# Altium PCB 海关全向控制器主控板V4.PcbDoc (part 2 of 3)
Units mil, origin at the board's own origin, x right, y up, seen from the top; angles counter-clockwise.
Board outline 3779.53 x 2795.28 mil, 2 copper layers (Top Layer, Bottom Layer), stack 65.792 mil thick; 119 components, 89 nets, 395 pads, 56 vias.
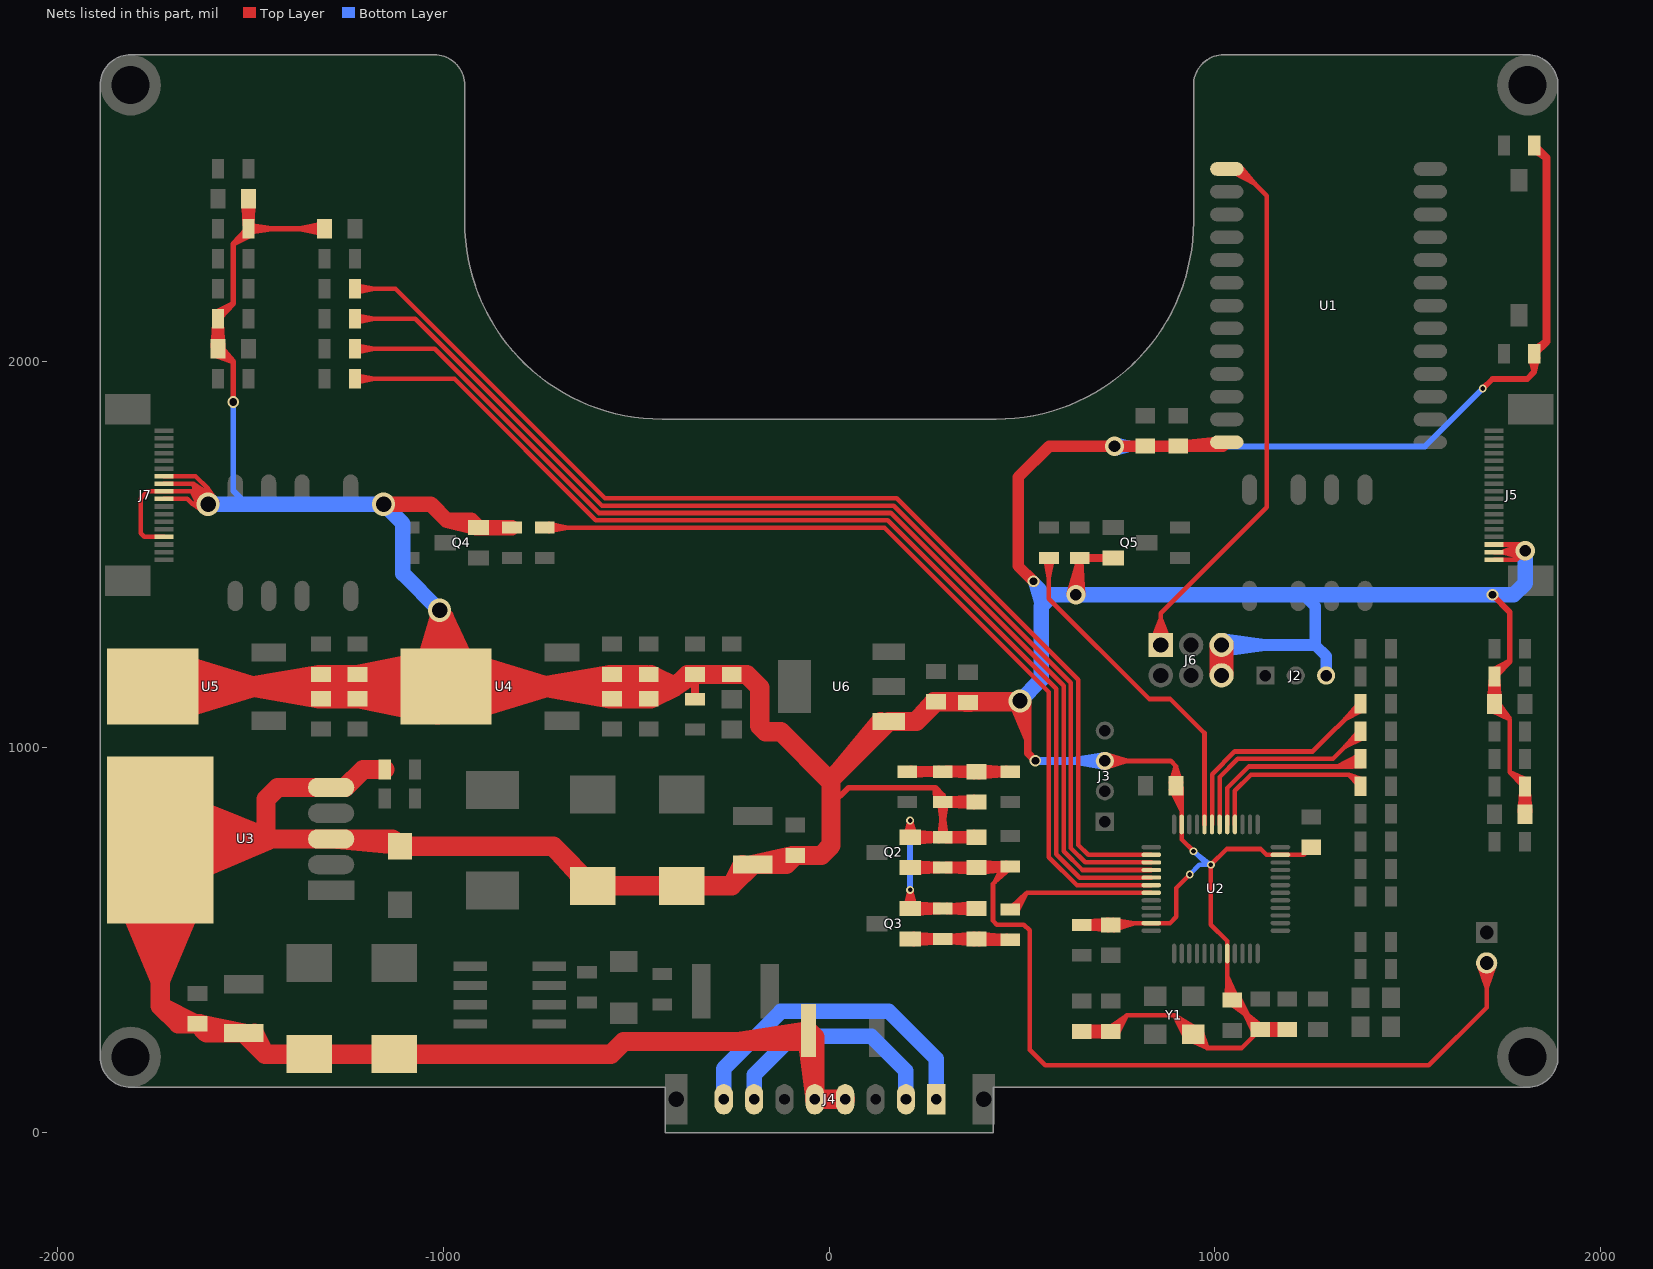
[diagram p2: the nets of this part, all layers, seen from the top]

## Via types
v1: diameter 20, hole 12, Top Layer to Bottom Layer, tented both sides, 31 vias
v2: diameter 30, hole 20, Top Layer to Bottom Layer, tented both sides, 12 vias
v3: diameter 50, hole 30, Top Layer to Bottom Layer, tented both sides, 8 vias
v4: diameter 60, hole 40, Top Layer to Bottom Layer, tented both sides, 5 vias

## Nets (pads, with @x,y where several pads share a name; then routed paths per layer and width w, separated by ;. In a path a pad name is that pad's centre, name@x,y a point inside that pad or via, vN(x,y) a via of type N, cw(c..) or ccw(c..) an arc to the next point about the centre after c; other vN are vias at no path point) (continued)
BT_TX: J6.1 U1.1 | length 1892.4
  Top Layer w12: J6.1@834.96,1269.82 860,1332.5 ; J6.1@846.57,1266.35 860,1332.5 ; J6.1@860,1265 860,1346.87 1135,1621.87 1135,2430 1065.67,2499.33 U1.1@1006.22,2499.33 ; J6.1@873.43,1266.35 860,1332.5 ; J6.1@885.04,1269.82 860,1332.5 ; U1.1@1050.3,2489.59 1104.85,2460.15 ; U1.1@1056.81,2499.33 1104.85,2460.15 ; U1.1@1065.04,2507.67 1104.85,2460.15
CH+: J4.2 J4.7 | length 714.5
  Bottom Layer w40: J4.7@-194.45,87.12 -194.45,150.55 ; J4.7@-194.45,102.87 -194.45,150.55 ; J4.2@199.25,87.12 199.25,160.75 ; J4.2@199.25,102.87 199.25,160.75 ; -194.45,150.55 -95,250 110,250 199.25,160.75
CH-: J4.1 J4.8 | length 1001.1
  Bottom Layer w40: J4.8@-273.19,87.12 -273.19,166.81 ; J4.8@-273.19,102.87 -273.19,166.81 ; J4.1@277.99,87.12 277.99,192.01 ; J4.1@277.99,102.87 277.99,192.01 ; -273.19,166.81 -125,315 155,315 277.99,192.01
CTRBTPOW: R18.2 U2.32 | length 1087
  Top Layer w12: R18.2@560.3,1489.71 570,1438.88 ; R18.2@579.7,1489.71 570,1438.88 ; U2.32@973.35,799.72 973.35,1036.65 885,1125 830,1125 570,1385 R18.2@570,1490.63 570,1438.88 ; U2.32@973.35,819.8 973.35,861.31
CTRPOW: R12.1 U2.43 | length 580.3
  Top Layer w12: R12.1@470,579.37 513.19,622.56 U2.43@835.55,622.56 ; R12.1@472.68,585.98 511.2,620.57 ; R12.1@479.84,579.37 511.2,620.57 ; R12.1@488.12,574.22 511.2,620.57 ; 773.96,622.56 U2.43@815.47,622.56
CTRVEDIOPOW: R17.2 U2.42 | length 2404.3
  Top Layer w12: R17.2@-737.12,1569.37 143.76,1569.37 570,1143.13 570,715 642.76,642.24 U2.42@835.55,642.24 ; R17.2@-727.28,1569.37 -675.53,1569.37 ; R17.2@-726.36,1559.67 -675.53,1569.37 ; R17.2@-726.36,1579.07 -675.53,1569.37 ; 773.96,642.24 U2.42@815.47,642.24
GND: C1.2 C2.1 C3.2 C4.2 C5.2 C6.2 C7.2 C8.2 C9.2 C10.2 C11.2 C12.1 C13.2 C14.2 C15.2 C16.1 C17.2 C18.2 C19.2 C20.2 C21.2 C22.2 C23.2 C24.2 C25.2 C26.2 C27.2 C28.2 C29.2 C30.2 C31.2 C32.2 C33.2 C34.2 C35.2 C36.2 C37.2 C38.1 D3.2 D4.1 J2.3 J3.3 J4.4 J4.5 J5.1 J5.2 J5.3 J6.5 J6.6 J7.7 J7.8 J7.9 J7.10 J7.15 Q2.2 Q3.2 Q4.2 Q5.2 R1.2 R2.1 R5.2 R6.1 R11.2 R13.2 R19.2 R20.2 R22.1 R23.2 R24.1 R25.1 R40.1 R41.1 U1.13 U2.8 U2.23 U2.35 U2.47 U3.0 U3.3 U3.5 U4.2 U5.2 U6.1 Y1.2 | length 63935.1
  Top Layer w12: J7.15@-1743.11,1545.28 -1775.28,1545.28 ; J7.9@-1743.11,1663.39 -1766.61,1663.39 ; J7.15@-1724.41,1545.28 -1775.28,1545.28 ; J7.10@-1724.41,1643.7 -1663.7,1643.7 -1650,1630 ; J7.8@-1724.41,1683.07 -1648.07,1683.07 ; J7.7@-1724.41,1702.76 -1642.76,1702.76 -1610,1670 ; J7.10@-1705.71,1643.7 -1663.8,1643.7 ; J7.9@-1705.71,1663.39 -1663.8,1663.39 ; J7.8@-1705.71,1683.07 -1663.8,1683.07 ; J7.7@-1705.71,1702.76 -1663.8,1702.76 ; v4@-1632.89,1637.2 -1610,1670 ; v4@-1631.74,1619.83 -1648.07,1683.07 ; v4@-1628.45,1614.65 -1653.39,1663.39 ; v4@-1621.86,1631.8 -1610,1670 ; v4@-1620.35,1623.93 -1648.07,1683.07 ; v4@-1618.32,1621.35 -1653.39,1663.39 ; v4@-1617.2,1607.11 -1650,1630 ; v4@-1617.2,1652.89 -1650,1630 ; v4@-1611.8,1618.14 -1650,1630 ; v4@-1611.8,1641.86 -1650,1630 ; v4@-1610,1645 -1648.07,1683.07 ; v4@-1603.77,1640.26 -1653.39,1663.39 ; v4@-1600.93,1637.86 -1648.07,1683.07 ; v4@-1599.89,1651.77 -1653.39,1663.39 ; v4@-1598.14,1631.8 -1610,1670 ; v4@-1593.4,1647.33 -1648.07,1683.07 ; v4@-1587.11,1637.2 -1610,1670 ; C9.2@655,263.03 C10.2@730,263.03 771.97,305 ; R5.2@655,539.37 C7.2@730,539.37 734.45,543.82 U2.47@835.55,543.82 883.82,543.82 ; C9.2@659.64,249.4 C10.2@716.15,251.02 ; C9.2@659.64,276.66 C10.2@716.15,275.04 ; R5.2@664.84,539.37 C7.2@716.59,539.37 ; C9.2@665.41,250.11 C10.2@716.15,275.04 ; C9.2@665.41,275.95 C10.2@716.15,251.02 ; R5.2@665.76,529.67 C7.2@716.59,539.37 ; R5.2@665.76,549.07 C7.2@716.59,539.37 ; J3.3@715,964.37 885.63,964.37 899.37,950.63 ; J3.3@717.6,946.94 774.62,964.37 J3.3@717.6,981.8 ; C7.2@720.24,526.24 R5.2@668.68,548.52 ; C7.2@720.24,552.5 R5.2@668.68,530.22 ; C10.2@722.41,249.45 C9.2@668.41,263.03 ; C10.2@722.41,276.61 C9.2@668.41,263.03 ; C10.2@724.09,263.03 C9.2@668.41,263.03 ; C7.2@724.66,525.7 R5.2@668.68,530.22 ; C7.2@724.66,553.04 R5.2@668.68,548.52 ; C10.2@726.71,273.16 771.97,305 ; C10.2@735.91,263.03 771.97,305 ; C7.2@735.91,539.37 791.86,543.82 ; C7.2@736.49,553.04 791.86,543.82 ; C7.2@738.64,525.96 791.86,543.82 ; C10.2@747.31,255.46 771.97,305 ; 773.96,543.82 U2.47@815.47,543.82 ; U2.47@855.63,543.82 883.82,543.82 ; C5.2@885.85,908 899.37,950.63 ; C5.2@886.58,889.23 914.29,835.61 ; C5.2@899.37,894.09 914.29,835.61 ; C5.2@899.37,900 899.37,950.63 ; C5.2@899.37,905.91 899.37,950.63 ; C5.2@909.37,900 914.29,895.08 U2.35@914.29,799.72 914.29,760.71 ; C5.2@912.89,908 899.37,950.63 ; C5.2@912.93,895.95 914.29,835.61 ; U2.35@914.29,779.64 914.29,760.71 ; U2.35@914.29,819.8 914.29,861.31 ; Y1.2@924.07,244.78 895,305 ; Y1.2@934.41,250.97 895,305 ; v1(935,670) 900,635 900,560 883.82,543.82 ; Y1.2@936.49,240.05 980,220 ; Y1.2@940.28,255.79 895,305 ; Y1.2@942.9,250.31 980,220 ; Y1.2@945.56,261.24 895,305 ; Y1.2@948.15,255.79 980,220 ; Y1.2@952.59,271.02 895,305 ; Y1.2@954.2,260.37 980,220 ; Y1.2@965.14,265.54 980,220 ; 990,649 v1(990,695) ; C8.2@1031.37,343.1 1032.4,405.67 ; 1032.4,403.49 U2.8@1032.4,445 ; U2.8@1032.4,485.15 1032.4,497.6 ; C8.2@1041.67,334.27 1090.14,299.23 ; C8.2@1050.91,344.37 1090.14,299.23 ; C8.2@1058.02,348.57 1032.4,405.67 ; C8.2@1062.19,352.11 1090.14,299.23 ; C4.2@1100.36,260.78 1074.87,314.5 ; C4.2@1111.97,268.03 1074.87,314.5 ; C4.2@1121.61,277.74 1074.87,314.5 ; C4.2@1123.78,268.03 C3.2@1179.47,268.03 ; C4.2@1125.46,254.45 C3.2@1179.47,268.03 ; C4.2@1125.46,281.61 C3.2@1179.47,268.03 ; U2.23@1150.12,720.98 1134.02,720.98 ; C3.2@1177.19,255.21 C4.2@1127.04,281.21 ; C3.2@1177.19,280.85 C4.2@1127.04,254.84 ; C3.2@1183.53,254.43 C4.2@1127.04,254.84 ; C3.2@1183.53,281.62 C4.2@1127.04,281.21 ; C3.2@1187.88,268.03 C4.2@1117.88,268.03 ; U2.23@1190.28,720.98 C6.2@1230.35,720.98 ; C6.2@1250,740.63 C6.2@1230.35,720.98 ; C34.2@1711.96,1117.33 R24.1@1715.93,1172.81 ; C34.2@1712.05,1119.73 R24.1@1725.63,1173.73 ; C34.2@1712.07,1119.87 R24.1@1725.63,1169.37 ; C34.2@1712.55,1122.07 R24.1@1735.33,1172.81 ; C34.2@1718.23,1094.72 1765,1072.77 ; R24.1@1718.53,1176.47 R24.1@1725.63,1169.37 ; J5.1@1724.41,1486.22 1781.81,1486.22 ; J5.2@1724.41,1505.91 v3@1801.5,1505.91 ; J5.3@1724.41,1525.59 1788.82,1525.59 v3(1805,1509.41) ; C34.2@1725.63,1106.23 1765,1072.77 ; C34.2@1735.8,1115.39 1765,1072.77 ; C34.2@1738.71,1122.07 R24.1@1715.93,1172.81 ; C34.2@1739.21,1119.73 R24.1@1725.63,1173.73 ; C34.2@1739.19,1119.87 R24.1@1725.63,1169.37 ; C34.2@1739.3,1117.33 R24.1@1735.33,1172.81 ; J5.1@1743.11,1486.22 1781.81,1486.22 ; J5.2@1743.11,1505.91 v3@1785.02,1505.91 ; J5.3@1743.11,1525.59 1785.02,1525.59 ; C35.2@1790.7,831.61 R25.1@1794.67,887.09 ; C35.2@1791.29,836.35 R25.1@1814.07,887.09 ; R25.1@1795,905 1765,935 ; R25.1@1798.03,900.29 1765,935 ; C35.2@1804.37,826.42 R25.1@1804.37,897.85 ; R25.1@1804.37,907.69 1765,935 ; R25.1@1809.08,916.22 1765,935 ; C35.2@1817.45,836.35 R25.1@1794.67,887.09 ; C35.2@1818.04,831.61 R25.1@1814.07,887.09 ; -1775.28,1545.28 -1785,1555 -1785,1645 -1766.61,1663.39 ; -1766.61,1663.39 J7.9@-1724.41,1663.39 -1653.39,1663.39 ; -1653.39,1663.39 v4(-1610,1630) ; -1653.39,1663.39 v4@-1620,1630 ; -1650,1630 v4(-1610,1630) ; -1650,1630 v4@-1620,1630 ; -1648.07,1683.07 v4(-1610,1630) ; v4@-1620,1630 v4(-1610,1630) ; v4(-1610,1630) -1610,1670 ; C9.2@660.91,263.03 C10.2@716.59,263.03 ; C9.2@660.91,263.03 C10.2@716.15,275.04 ; C9.2@660.91,263.03 C10.2@716.59,263.03 ; C9.2@660.91,263.03 C10.2@716.15,251.02 ; R5.2@668.41,539.37 C7.2@724.09,539.37 ; R5.2@668.41,539.37 722.41,552.95 R5.2@668.41,539.37 ; R5.2@668.41,539.37 722.41,525.79 R5.2@668.41,539.37 ; R5.2@668.41,539.37 C7.2@724.09,539.37 ; R5.2@668.68,530.22 C7.2@724.09,539.37 ; R5.2@668.68,548.52 C7.2@724.09,539.37 ; C10.2@716.59,263.03 662.59,249.45 C10.2@716.59,263.03 ; C10.2@716.59,263.03 662.59,276.61 C10.2@716.59,263.03 ; 771.97,305 895,305 ; 895,305 Y1.2@944.21,255.79 980,220 ; 914.29,760.71 v1(945,730) 914.29,760.71 ; 980,220 1069.85,220 C4.2@1117.88,268.03 ; v1(990,695) 1031,736 1119,736 1134.02,720.98 ; v1(990,695) 990,540 1032.4,497.6 ; 1032.4,405.67 C8.2@1045,344.37 ; 1032.4,497.6 U2.8@1032.4,465.08 1032.4,356.97 C8.2@1045,344.37 ; C8.2@1045,344.37 1117.88,271.5 C4.2@1117.88,268.03 ; C4.2@1126.28,268.03 C3.2@1181.97,268.03 ; C4.2@1126.28,268.03 1180.29,281.61 C4.2@1126.28,268.03 ; C4.2@1126.28,268.03 1180.29,254.45 C4.2@1126.28,268.03 ; C4.2@1126.28,268.03 C3.2@1181.97,268.03 ; C4.2@1127.04,254.84 C3.2@1181.97,268.03 ; C4.2@1127.04,281.21 C3.2@1181.97,268.03 ; 1134.02,720.98 U2.23@1170.2,720.98 C6.2@1230.35,720.98 ; R24.1@1715.93,1172.81 C34.2@1725.63,1118.04 ; R24.1@1715.93,1172.81 C34.2@1725.63,1121.98 ; C34.2@1725.63,1118.04 R24.1@1725.63,1173.73 ; C34.2@1725.63,1118.04 R24.1@1735.33,1172.81 ; C34.2@1725.63,1118.04 R24.1@1725.63,1169.37 ; C34.2@1725.63,1121.98 R24.1@1725.63,1173.73 ; C34.2@1725.63,1121.98 R24.1@1735.33,1172.81 ; R24.1@1725.63,1169.37 C34.2@1725.63,1112.14 1765,1072.77 ; J5.2@1743.58,1505.91 v3(1805,1509.41) ; J5.2@1743.58,1505.91 1804.2,1516.36 J5.2@1743.86,1505.91 ; J5.2@1743.58,1505.91 1805,1502.41 J5.2@1743.86,1505.91 ; J5.2@1743.58,1505.91 1801,1527.98 J5.2@1743.86,1505.91 ; J5.2@1743.58,1505.91 1803.14,1490.5 J5.2@1743.86,1505.91 ; J5.2@1743.86,1505.91 v3(1805,1509.41) ; 1765,935 1765,1072.77 ; 1781.81,1486.22 v3@1801.5,1505.91 ; R25.1@1794.67,887.09 C35.2@1804.37,832.32 ; R25.1@1794.67,887.09 C35.2@1804.37,836.26 ; v3@1801.5,1505.91 v3(1805,1509.41) ; C35.2@1804.37,832.32 R25.1@1804.37,888 ; C35.2@1804.37,832.32 R25.1@1814.07,887.09 ; C35.2@1804.37,832.32 R25.1@1804.37,888.01 ; C35.2@1804.37,836.26 R25.1@1804.37,888 ; C35.2@1804.37,836.26 R25.1@1814.07,887.09 ; R25.1@1804.37,888 1817.95,834 R25.1@1804.37,888.01 ; R25.1@1804.37,888 1790.79,834 R25.1@1804.37,888.01
  Top Layer w15: C37.2@-1596.55,2038.34 R41.1@-1592.6,2100.31 ; C37.2@-1596.5,2039.91 R41.1@-1584.37,2103.45 ; C37.2@-1596.5,2039.96 R41.1@-1584.37,2100.87 ; C37.2@-1596.23,2041.55 R41.1@-1576.14,2100.31 ; C37.2@-1589.91,2016.1 -1545,2000 ; R41.1@-1588.75,2127.55 -1545,2150.08 ; C37.2@-1584.37,2026.95 -1545,2000 ; R41.1@-1584.37,2120.56 -1545,2150.08 ; R41.1@-1578.89,2114.4 -1545,2150.08 ; C37.2@-1576.26,2036.05 -1545,2000 ; C37.2@-1572.51,2041.55 R41.1@-1592.6,2100.31 ; C37.2@-1572.24,2039.91 R41.1@-1584.37,2103.45 ; C37.2@-1572.24,2039.96 R41.1@-1584.37,2100.87 ; C37.2@-1572.19,2038.34 R41.1@-1576.14,2100.31 ; v2(-1545,1895) -1545,2000 ; C36.2@-1517.81,2416.66 R40.1@-1513.86,2354.69 ; C36.2@-1517.76,2415.04 R40.1@-1505.63,2354.13 ; C36.2@-1517.76,2415.09 R40.1@-1505.63,2351.55 ; C36.2@-1517.49,2413.45 R40.1@-1497.4,2354.69 ; R40.1@-1511.11,2340.6 -1545,2304.92 ; R40.1@-1505.63,2334.44 -1545,2304.92 ; C36.2@-1505.63,2422.14 R40.1@-1505.63,2344.29 ; R40.1@-1505.07,2336.06 -1444.88,2344.29 R40.1@-1505.07,2352.51 ; R40.1@-1501.25,2327.45 -1545,2304.92 ; C36.2@-1493.77,2413.45 R40.1@-1513.86,2354.69 ; C36.2@-1493.5,2415.04 R40.1@-1505.63,2354.13 ; C36.2@-1493.5,2415.09 R40.1@-1505.63,2351.55 ; C36.2@-1493.45,2416.66 R40.1@-1497.4,2354.69 ; C38.1@-1309.3,2332.15 -1372.84,2344.29 ; C38.1@-1309.3,2356.42 -1372.84,2344.29 ; 5,850 50,895 275,895 ; Q3.2@198.6,582.85 v1(210,630) ; Q3.2@210,582.2 v1(210,630) ; Q2.2@218.22,754.32 R11.2@283.06,758.48 ; Q2.2@218.22,778.67 R11.2@283.06,774.51 ; Q3.2@218.58,581.5 R13.2@283.27,581.5 ; Q3.2@219.73,569.36 R13.2@283.27,581.5 ; Q3.2@219.73,593.63 R13.2@283.27,581.5 ; Q2.2@221.21,754.6 R11.2@283.06,774.51 ; Q2.2@221.21,778.39 R11.2@283.06,758.48 ; Q3.2@222.77,583.2 v1(210,630) ; R22.1@277.01,856.45 275,895 ; R13.2@283.12,573.5 Q3.2@224.86,592.65 ; R13.2@283.12,589.49 Q3.2@224.86,570.34 ; R11.2@284.6,758.27 Q2.2@224.41,766.5 ; R11.2@284.6,774.72 Q2.2@224.41,766.5 ; R11.2@285.16,766.5 Q2.2@224.41,766.5 ; R22.1@285.16,857.75 275,895 ; R13.2@286.11,573.3 Q3.2@224.86,570.34 ; R13.2@286.11,589.69 Q3.2@224.86,592.65 ; R11.2@286.77,767.05 295,827.24 R11.2@303.23,767.05 ; R22.1@286.77,857.19 295,797.01 R22.1@303.23,857.19 ; R22.1@292.84,860.76 275,895 ; R11.2@304.02,758.29 C23.2@365.44,756.27 ; R11.2@304.02,774.7 C23.2@365.44,776.72 ; R22.1@304.02,849.55 C25.2@365.44,847.53 ; R22.1@304.02,865.96 C25.2@365.44,867.98 ; R13.2@304.84,581.5 C24.2@365.59,581.5 ; R13.2@305.4,573.27 C24.2@365.59,581.5 ; R13.2@305.4,589.72 C24.2@365.59,581.5 ; R11.2@306.76,758.47 C23.2@365.44,776.72 ; R11.2@306.76,774.52 C23.2@365.44,756.27 ; R22.1@306.76,849.73 C25.2@365.44,867.98 ; R22.1@306.76,865.78 C25.2@365.44,847.53 ; C24.2@374.09,569.57 R13.2@311.99,588.82 ; C24.2@374.09,593.42 R13.2@311.99,574.17 ; C23.2@375.45,754.36 R11.2@311.91,766.5 ; C23.2@375.45,778.63 R11.2@311.91,766.5 ; C25.2@375.45,845.62 R22.1@311.91,857.75 ; C25.2@375.45,869.89 R22.1@311.91,857.75 ; C23.2@376.59,766.5 R11.2@311.91,766.5 ; C25.2@376.59,857.75 R22.1@311.91,857.75 ; C24.2@376.83,569.31 R13.2@311.99,574.17 ; C24.2@376.83,593.68 R13.2@311.99,588.82 ; C24.2@382.5,581.5 R13.2@295,581.5 Q3.2@210.71,581.5 v1(210,630) ; C23.2@382.5,766.5 R11.2@295,766.5 ; C25.2@382.5,857.75 R22.1@295,857.75 ; v1(1695,1930) 1720,1955 1810,1955 1828.25,1973.25 ; v2(1720,1395) 1765,1350 1765,1222.94 ; R24.1@1721.25,1200.4 1765,1222.94 ; R24.1@1725.63,1183.57 1765,1222.94 ; R24.1@1725.63,1193.41 1765,1222.94 ; R24.1@1731.11,1187.25 1765,1222.94 ; R2.1@1820.05,2009.24 1828.25,1973.25 ; R2.1@1828.25,2010.16 1828.25,1973.25 ; R2.1@1828.25,2020 1828.25,1973.25 ; R2.1@1836.44,2009.24 1828.25,1973.25 ; R41.1@-1592.6,2100.31 C37.2@-1584.37,2038.76 ; R41.1@-1592.6,2100.31 C37.2@-1584.37,2040.12 ; C37.2@-1584.37,2038.76 R41.1@-1584.37,2100.87 ; C37.2@-1584.37,2038.76 R41.1@-1576.14,2100.31 ; C37.2@-1584.37,2038.76 R41.1@-1584.37,2103.45 ; C37.2@-1584.37,2040.12 R41.1@-1584.37,2100.87 ; C37.2@-1584.37,2040.12 R41.1@-1576.14,2100.31 ; -1545,2000 -1577.86,2032.86 C37.2@-1584.37,2032.86 R41.1@-1584.37,2110.71 -1545,2150.08 ; -1545,2150.08 -1545,2304.92 ; -1545,2304.92 R40.1@-1505.63,2344.29 ; R40.1@-1513.86,2354.69 C36.2@-1505.63,2416.24 ; R40.1@-1513.86,2354.69 C36.2@-1505.63,2414.88 ; R40.1@-1505.63,2344.29 C38.1@-1308.15,2344.29 -1372.84,2344.29 ; R40.1@-1505.63,2351.55 C36.2@-1505.63,2416.24 ; R40.1@-1505.63,2354.13 C36.2@-1505.63,2416.24 ; R40.1@-1505.63,2354.13 C36.2@-1505.63,2414.88 ; C36.2@-1505.63,2414.88 R40.1@-1497.4,2354.69 ; C36.2@-1505.63,2416.24 R40.1@-1497.4,2354.69 ; v1(210,810) 222.77,768.23 v1@210.71,809.29 ; v1(210,810) 198.65,768.23 v1@210.71,809.29 ; v1(210,810) Q2.2@210.71,766.5 ; v1(210,810) v1@210.71,809.29 ; Q2.2@210.71,766.5 v1@210.71,809.29 ; Q2.2@210.71,766.5 R11.2@295,766.5 ; Q2.2@218.58,766.5 R11.2@283.06,758.48 ; Q2.2@218.58,766.5 R11.2@283.27,766.5 ; Q2.2@218.58,766.5 R11.2@283.06,774.51 ; Q2.2@218.58,766.5 R11.2@283.27,766.5 ; Q3.2@224.41,581.5 R13.2@285.16,581.5 ; Q3.2@224.41,581.5 284.6,589.72 Q3.2@224.41,581.5 ; Q3.2@224.41,581.5 284.6,573.27 Q3.2@224.41,581.5 ; Q3.2@224.41,581.5 R13.2@285.16,581.5 ; Q3.2@224.86,570.34 R13.2@285.16,581.5 ; Q3.2@224.86,592.65 R13.2@285.16,581.5 ; 275,895 295,875 ; R11.2@283.27,766.5 219.73,754.36 R11.2@283.27,766.5 ; R11.2@283.27,766.5 219.73,778.63 R11.2@283.27,766.5 ; R11.2@295,766.5 R22.1@295,857.75 ; R22.1@295,857.75 295,875 ; R22.1@295,857.75 295,875 ; 295,875 303.01,859.73 295,875 ; 295,875 286.99,859.73 295,875 ; R11.2@304.84,766.5 C23.2@365.44,756.27 ; R11.2@304.84,766.5 C23.2@365.59,766.5 ; R11.2@304.84,766.5 C23.2@365.44,776.72 ; R11.2@304.84,766.5 C23.2@365.59,766.5 ; R22.1@304.84,857.75 C25.2@365.59,857.75 ; R22.1@304.84,857.75 C25.2@365.44,867.98 ; R22.1@304.84,857.75 C25.2@365.44,847.53 ; R22.1@304.84,857.75 C25.2@365.59,857.75 ; R13.2@311.91,581.5 C24.2@376.59,581.5 ; R13.2@311.91,581.5 375.45,593.63 R13.2@311.91,581.5 ; R13.2@311.91,581.5 375.45,569.36 R13.2@311.91,581.5 ; R13.2@311.91,581.5 C24.2@376.59,581.5 ; R13.2@311.99,574.17 C24.2@376.59,581.5 ; R13.2@311.99,588.82 C24.2@376.59,581.5 ; C23.2@365.59,766.5 305.4,758.27 C23.2@365.59,766.5 ; C23.2@365.59,766.5 305.4,774.72 C23.2@365.59,766.5 ; C25.2@365.59,857.75 305.4,849.53 C25.2@365.59,857.75 ; C25.2@365.59,857.75 305.4,865.98 C25.2@365.59,857.75
  Top Layer w20: R23.2@-347.6,1124.37 C30.2@-347.6,1188.62 ; v4@475.89,1114.09 515,1021.51 ; v4@514.9,1122.01 515,1021.51 ; v3@625.29,1397.92 R20.2@650,1483.87 ; v3@625.3,1397.99 R20.2@650,1481.72 ; v3@650,1414.88 R20.2@650,1490.63 ; Q5.2@735.59,1490.63 659.84,1490.63 728.82,1490.63 R20.2@650,1490.63 ; Q5.2@736.69,1490.63 R20.2@650,1490.63 ; R2.1@1828.25,2020 1860,2051.75 ; R2.1@1828.25,2029.84 1860,2051.75 ; R1.2@1828.25,2550.16 1860,2528.25 ; R1.2@1828.25,2560 1860,2528.25 ; 515,985 v2(535,965) 515,985 ; 515,985 515,1100 v4(495,1120) 515,1021.51 ; v3(640,1395) R20.2@650,1483.87 ; v3(640,1395) R20.2@650,1481.72 ; v3(640,1395) 650,1405 R20.2@650,1490.63 ; R20.2@650,1481.72 654.99,1394.57 R20.2@650,1483.87 ; 1860,2051.75 1860,2528.25
  Top Layer w30: 624.99,1780.63 v3(740,1780) ; J6.5@1001.08,1263.27 J6.6@1017.48,1186.26 ; J6.5@1001.07,1266.73 J6.6@1001.08,1187.99 ; J6.5@1001.8,1259.89 J6.6@1033.89,1187.99 ; U1.13@1020.59,1780.63 910.91,1780.63 1005.63,1790.67 C2.1@905,1780.63 ; U1.13@1031.22,1790.67 1021.18,1780.63 C2.1@905,1780.63 ; J6.5@1033.17,1259.89 J6.6@1001.08,1187.99 ; J6.5@1033.89,1263.27 J6.6@1017.48,1186.26 ; J6.5@1033.89,1266.73 J6.6@1033.89,1187.99 ; 490,1470 v2(530,1430) 490,1470 ; 490,1470 490,1700 570.63,1780.63 C1.2@820,1780.63 ; v3(740,1780) 704.41,1780.63 814.09,1780.63 v3(740,1780) ; v3(740,1780) C1.2@820,1780.63 ; C1.2@820,1780.63 899.09,1780.63 825.91,1780.63 C2.1@905,1780.63 ; C1.2@820,1780.63 C2.1@905,1780.63 ; J6.6@1001.08,1187.99 J6.5@1017.48,1265 ; J6.6@1017.48,1186.26 J6.5@1017.48,1265 ; J6.5@1017.48,1265 J6.6@1033.89,1187.99
  Top Layer w40: v4(-1155,1630) -1032.89,1630 -990.89,1588 ; U4.2@-1069.39,1174.14 v4@-992.84,1337.84 ; U4.2@-1056.34,1202.04 v4(-1010,1355) ; U4.2@-1031.04,1161.21 v4@-992.84,1337.84 ; U4.2@-1023.31,1196.97 v4(-1010,1355) ; U4.2@-992.84,1157.12 v4@-992.84,1337.84 ; U4.2@-992.84,1198.43 v4(-1010,1355) ; U4.2@-964.2,1205.45 v4(-1010,1355) ; U4.2@-954.63,1161.21 v4@-992.84,1337.84 ; U4.2@-936.52,1217.42 v4(-1010,1355) ; Q4.2@-916.69,1569.37 -990.89,1588 ; U4.2@-916.28,1174.14 v4@-992.84,1337.84 ; v4(-1010,1355) v4@-992.84,1337.84 ; -990.89,1588 -927.45,1588 Q4.2@-908.82,1569.37 ; Q4.2@-908.82,1569.37 -831.97,1569.37 -900.94,1569.37 R19.2@-822.12,1569.37 Q4.2@-908.82,1569.37
  Top Layer w50: U3.0@-1844.65,657.95 -1734.04,392.26 ; U3.0@-1796.46,673.2 -1734.04,392.26 ; U5.2@-1753.72,1157.12 U4.2@-992.84,1157.12 -398.23,1157.12 ; U3.0@-1734.04,680.05 -1734.04,392.26 ; U5.2@-1734.04,1157.12 -1485.61,1157.12 ; U3.0@-1727.91,821.29 -1446.22,762.12 ; U3.0@-1726.47,696.45 -1446.22,762.12 ; U5.2@-1723.19,1084.51 -1485.61,1157.12 ; U5.2@-1723.19,1229.74 -1485.61,1157.12 ; U3.0@-1713.22,869.65 -1446.22,762.12 ; U3.0@-1710.66,648.45 -1446.22,762.12 ; U3.0@-1671.62,673.2 -1734.04,392.26 ; U3.0@-1623.43,657.95 -1734.04,392.26 ; -1501.16,762.12 U3.3@-1326.16,762.12 ; C11.2@-1490.04,259.13 -1462.48,204.01 ; -1460,775 -1460,865 -1429.54,895.46 ; C22.2@-1357.44,204.01 -1462.48,204.01 ; C22.2@-1336.66,204.01 C21.2@-1137.44,204.01 ; U3.5@-1326.16,895.46 -1429.54,895.46 ; U3.5@-1256.16,895.46 -1207.88,942.12 ; C26.2@-1222.6,1125.63 C29.2@-1228.51,1188.62 ; C21.2@-1117.76,204.01 -918.55,204.01 ; U4.2@-1036.43,1087.7 C29.2@-1216.7,1188.62 ; U4.2@-1029.86,1085.78 -1263.16,1180.26 ; U4.2@-1029.86,1228.47 -1263.16,1133.99 ; U4.2@-1023.37,1084.51 -1260.95,1157.12 ; U4.2@-1023.37,1229.74 -1260.95,1157.12 ; U4.2@-1016.51,1083.81 -1263.16,1133.99 ; U4.2@-1016.51,1230.44 -1263.16,1180.26 ; U4.2@-1014.4,1230.53 C29.2@-1216.7,1188.62 ; U4.2@-973.15,1157.12 -724.73,1157.12 ; U4.2@-962.3,1084.51 -724.73,1157.12 ; U4.2@-962.3,1229.74 -724.73,1157.12 ; C13.2@-622.44,640.68 -714.83,742.91 ; C13.2@-591.66,640.68 C14.2@-392.44,640.68 ; C19.2@-568.51,1188.62 -751.75,1157.12 -568.51,1125.63 -657,1157.12 ; C17.2@-467.6,1125.63 C20.2@-473.51,1188.62 ; C14.2@-372.76,640.68 -252.72,640.68 ; C30.2@-353.51,1188.62 -398.23,1157.12 ; -236.78,237.12 D3.2@-53.58,265 ; C15.2@-225.16,695.8 -252.72,640.68 ; C16.1@-81.7,719.42 -20.58,719.42 ; 26.73,938.85 U6.1@133.78,1066.57 ; J4.4@41.77,87.12 J4.5@-36.97,87.12 ; U6.1@175.12,1066.57 226.22,1066.57 ; C32.2@271.49,1117.75 226.22,1066.57 ; -1734.04,329.04 C12.1@-1643.51,282.75 ; -1734.04,329.04 -1687.75,282.75 ; -1734.04,329.04 U3.0@-1734.04,758.79 ; U3.0@-1734.04,758.79 -1446.22,762.12 ; U3.0@-1734.04,758.79 -1730.71,762.12 U3.3@-1291.16,762.12 ; -1687.75,282.75 C12.1@-1643.51,282.75 ; -1687.75,282.75 C12.1@-1643.51,282.75 ; -1687.75,282.75 C12.1@-1637.6,282.75 -1613.98,259.13 ; C12.1@-1631.7,282.75 -1613.98,259.13 ; C12.1@-1631.7,282.75 -1545.16,259.13 -1613.98,259.13 ; C12.1@-1631.7,282.75 -1613.98,259.13 ; C12.1@-1631.7,282.75 C11.2@-1517.6,259.13 ; C12.1@-1631.7,282.75 -1613.98,259.13 ; -1613.98,259.13 C11.2@-1517.6,259.13 ; C11.2@-1517.6,259.13 -1462.48,204.01 ; -1462.48,204.01 C22.2@-1347.6,204.01 C21.2@-1127.6,204.01 -565.71,204.01 -532.6,237.12 -81.46,237.12 ; -1429.54,895.46 U3.5@-1291.16,895.46 -1254.54,895.46 -1207.88,942.12 ; -1412.02,1157.12 C26.2@-1228.51,1125.63 ; -1412.02,1157.12 -1323.51,1125.63 -1506.77,1157.12 -1323.51,1188.62 -1412.02,1157.12 ; -1412.02,1157.12 C29.2@-1228.51,1188.62 ; C27.2@-1311.7,1125.63 C26.2@-1228.51,1125.63 ; C27.2@-1311.7,1125.63 C26.2@-1228.51,1125.63 ; C27.2@-1311.7,1125.63 -1128.91,1157.12 ; C27.2@-1311.7,1125.63 C29.2@-1228.51,1188.62 ; C28.2@-1311.7,1188.62 C26.2@-1228.51,1125.63 ; C28.2@-1311.7,1188.62 -1128.91,1157.12 ; C28.2@-1311.7,1188.62 C29.2@-1228.51,1188.62 ; U3.3@-1291.16,762.12 -1112.6,745.87 -1256.16,762.12 D4.1@-1131.81,762.12 ; U3.3@-1291.16,762.12 D4.1@-1131.81,762.12 ; -1263.16,1133.99 U4.2@-1012.52,1157.12 ; -1263.16,1180.26 U4.2@-1012.52,1157.12 ; -1260.95,1157.12 U4.2@-1012.52,1157.12 ; C26.2@-1216.7,1125.63 U4.2@-1012.52,1157.12 ; C26.2@-1216.7,1125.63 U4.2@-1036.43,1226.55 ; C26.2@-1216.7,1125.63 U4.2@-1014.4,1083.72 ; C26.2@-1216.7,1125.63 U4.2@-1012.52,1157.12 ; C26.2@-1216.7,1125.63 U4.2@-1036.43,1226.55 ; C26.2@-1216.7,1125.63 U4.2@-1014.4,1083.72 ; C26.2@-1216.7,1125.63 U4.2@-1012.52,1157.12 ; C26.2@-1216.7,1125.63 U4.2@-1036.43,1226.55 ; C26.2@-1216.7,1125.63 U4.2@-1014.4,1083.72 ; C26.2@-1216.7,1125.63 -1034.68,1157.12 C29.2@-1216.7,1188.62 ; C26.2@-1216.7,1125.63 -1128.91,1157.12 ; C26.2@-1216.7,1125.63 -1128.91,1157.12 ; C29.2@-1216.7,1188.62 U4.2@-1012.52,1157.12 ; -1207.88,942.12 R6.1@-1151.97,942.12 -1207.88,942.12 ; D4.1@-1131.81,762.12 D4.1@-1112.6,742.91 -714.83,742.91 ; -1128.91,1157.12 U4.2@-1012.52,1157.12 ; -1128.91,1157.12 U4.2@-1035.68,1226.8 ; -1128.91,1157.12 U4.2@-1035.68,1087.45 ; -1128.91,1157.12 U4.2@-1012.52,1157.12 ; -1128.91,1157.12 U4.2@-1035.68,1226.8 ; -1128.91,1157.12 U4.2@-1035.68,1087.45 ; -1128.91,1157.12 U4.2@-1012.52,1157.12 ; -1128.91,1157.12 U4.2@-1035.68,1226.8 ; -1128.91,1157.12 U4.2@-1035.68,1087.45 ; -1128.91,1157.12 U4.2@-1012.52,1157.12 ; -1128.91,1157.12 U4.2@-1035.68,1226.8 ; -1128.91,1157.12 U4.2@-1035.68,1087.45 ; -714.83,742.91 C13.2@-612.6,640.68 C14.2@-382.6,640.68 -252.72,640.68 ; -657,1157.12 C17.2@-473.51,1125.63 ; -657,1157.12 C20.2@-473.51,1188.62 ; C18.2@-556.7,1125.63 C17.2@-473.51,1125.63 ; C18.2@-556.7,1125.63 C17.2@-473.51,1125.63 ; C18.2@-556.7,1125.63 -398.23,1157.12 ; C18.2@-556.7,1125.63 C20.2@-473.51,1188.62 ; C19.2@-556.7,1188.62 C17.2@-473.51,1125.63 ; C19.2@-556.7,1188.62 C20.2@-473.51,1188.62 ; C19.2@-556.7,1188.62 -398.23,1157.12 ; C17.2@-461.7,1125.63 -398.23,1157.12 ; C17.2@-461.7,1125.63 -398.23,1157.12 ; C17.2@-461.7,1125.63 -398.23,1157.12 ; -398.23,1157.12 -461.7,1188.62 -398.23,1157.12 ; -398.23,1157.12 -366.73,1188.62 C30.2@-347.6,1188.62 ; C30.2@-347.6,1188.62 -258.51,1188.62 -341.7,1188.62 C31.2@-252.6,1188.62 ; C30.2@-347.6,1188.62 C31.2@-252.6,1188.62 ; -252.72,640.68 C15.2@-197.6,695.8 ; C31.2@-252.6,1188.62 -213.62,1188.62 ; -213.62,1188.62 -246.7,1188.62 -213.62,1188.62 ; -213.62,1188.62 -180,1155 -180,1055 -165,1040 -125,1040 5,910 ; C15.2@-197.6,695.8 C16.1@-93.51,719.42 ; C15.2@-197.6,695.8 -111.22,695.8 ; -111.22,695.8 -170.04,695.8 C16.1@-93.51,719.42 ; -111.22,695.8 C16.1@-93.51,719.42 ; -111.22,695.8 C16.1@-93.51,719.42 ; -111.22,695.8 C16.1@-87.6,719.42 -20.58,719.42 ; -81.46,237.12 D3.2@-53.58,265 ; -81.46,237.12 D3.2@-53.58,265 ; D3.2@-53.58,265 D3.2@-36.97,248.39 ; J4.5@-36.97,87.12 -53.58,215.79 -36.97,102.87 D3.2@-36.97,248.39 ; J4.5@-36.97,87.12 D3.2@-36.97,248.39 ; -20.58,719.42 5,745 5,850 5,910 ; 5,910 5,917.13 U6.1@154.45,1066.57 226.22,1066.57 ; 226.22,1066.57 C32.2@277.4,1117.75 ; C32.2@277.4,1117.75 354.09,1115.63 283.3,1117.75 452.99,1117.75 v4(495,1120) ; C32.2@277.4,1117.75 492.75,1117.75 365.91,1115.63 v4(495,1120) ; v4(495,1120) 314.94,1117.75 v4(495,1120) ; C22.2@-1337.76,204.01 -1138.55,204.01 C22.2@-1337.76,204.01 ; C13.2@-602.76,640.68 -403.55,640.68 C13.2@-602.76,640.68
  Bottom Layer w12: v1(935,670) 960,695 ; v1@949.04,725.96 v1(990,695) ; v1@983.37,700.01 v1(945,730) v1@980,695 ; 960,695 v1(990,695) ; 960,695 v1@980,695 ; v1@980,695 v1(990,695)
  Bottom Layer w15: v2(-1545,1895) -1545,1665 -1510,1630 ; v1(210,630) v1(210,810) ; v3(740,1780) 1545,1780 v1(1695,1930) ; v3@742.19,1762.64 810,1780 v3@742.19,1797.36
  Bottom Layer w20: v2@530.63,964.37 J3.3@715,964.37 ; v2(535,965) 610.01,964.37 ; J3.3@713.89,950.79 631.38,964.37 J3.3@713.89,977.95
  Bottom Layer w30: J6.5@1017.48,1265 1260,1265 ; J6.5@1018.6,1248.54 1138.98,1265 J6.5@1018.6,1281.46 ; 1230,1395 1260,1365 1260,1265 ; J2.3@1288.74,1185.76 1288.74,1236.26 1260,1265 ; v2(530,1430) 550,1365 550,1410 ; v2(530,1430) 550,1410 ; v2(530,1430) 550,1410
  Bottom Layer w40: v4(-1610,1630) -1510,1630 v4(-1155,1630) -1105,1580 -1105,1450 ; v4(495,1120) 550,1175 550,1365 580,1395 v3(640,1395) 1230,1395 1645,1395 v2(1720,1395) 1775,1395 1805,1425 ; -1105,1450 v4(-1010,1355) -1105,1450 ; 1805,1425 v3(1805,1509.41) 1805,1425
KEY1: R30.2 U2.31 | length 787.8
  Top Layer w12: U2.31@993.03,799.72 993.03,929.9 1052.13,989 1254.15,989 R30.2@1378.03,1112.88 ; U2.31@993.03,819.8 993.03,861.31 ; R30.2@1371.42,1110.2 1336.82,1071.67 ; R30.2@1378.03,1103.03 1336.82,1071.67 ; R30.2@1383.18,1094.75 1336.82,1071.67
KEY2: R31.2 U2.30 | length 734.3
  Top Layer w12: U2.30@1012.72,799.72 1012.72,922.72 1060,970 1306.58,970 R31.2@1378.03,1041.44 ; U2.30@1012.72,819.8 1012.72,861.31 ; R31.2@1371.42,1038.77 1336.82,1000.24 ; R31.2@1378.03,1031.6 1336.82,1000.24 ; R31.2@1383.18,1023.32 1336.82,1000.24
KEY3: R32.2 U2.28 | length 594.9
  Top Layer w12: U2.28@1052.09,799.72 1052.09,887.09 1094,929 1347.61,929 ; U2.28@1052.09,819.8 1052.09,861.31 ; R32.2@1371.54,901.15 1347.61,929 ; R32.2@1378.03,898.58 1347.61,929 ; R32.2@1378.03,908.43 1347.61,929 ; R32.2@1382.37,917.15 1347.61,929
KEY4: R33.2 U2.29 | length 839.3
  Top Layer w12: U2.29@1032.4,799.72 1032.4,894.27 1088.13,950 1358.01,950 ; U2.29@1032.4,819.8 1032.4,861.31 ; R33.2@1374.27,979.01 1317.41,950 ; R33.2@1380.37,960.55 1317.41,950 ; 1317.41,950 R33.2@1378.03,970.01 1358.01,950 ; 1358.01,950 1378.03,960.17 1358.01,950 ; 1358.01,950 1371.83,967.7 1358.01,950 ; 1358.01,950 1380.45,950.73 1358.01,950
KEY5: R46.2 U2.41 | length 2996.4
  Top Layer w12: R46.2@-1229.41,1955 -971.22,1955 -604.59,1588.37 151.63,1588.37 589,1151 589,722.87 649.94,661.93 U2.41@835.55,661.93 ; R46.2@-1228.49,1945.3 -1177.66,1955 R46.2@-1228.49,1964.7 ; 773.96,661.93 U2.41@815.47,661.93
KEY6: R47.2 U2.40 | length 3020.5
  Top Layer w12: R47.2@-1229.41,2032.86 -1022.21,2032.86 -596.72,1607.37 159.5,1607.37 608,1158.87 608,730.74 657.13,681.61 U2.40@835.55,681.61 ; R47.2@-1228.49,2023.15 -1177.66,2032.86 R47.2@-1228.49,2042.56 ; 773.96,681.61 U2.40@815.47,681.61
KEY7: R48.2 U2.39 | length 3044.6
  Top Layer w12: R48.2@-1229.41,2110.71 -1073.19,2110.71 -588.85,1626.37 167.37,1626.37 627,1166.74 627,738.61 664.31,701.3 U2.39@835.55,701.3 ; R48.2@-1228.49,2101.01 -1177.66,2110.71 R48.2@-1228.49,2120.42 ; 773.96,701.3 U2.39@815.47,701.3
KEY8: R49.2 U2.38 | length 3068.7
  Top Layer w12: R49.2@-1229.41,2188.57 -1124.18,2188.57 -580.98,1645.37 175.24,1645.37 646,1174.61 646,746.48 671.5,720.98 U2.38@835.55,720.98 ; R49.2@-1228.49,2178.87 -1177.66,2188.57 R49.2@-1228.49,2198.28 ; 773.96,720.98 U2.38@815.47,720.98
NetC23_1: C23.1 Q2.1 R10.2 R11.1 S1.2 | length 5464.6
  Top Layer w12: R10.2@451.88,695.78 428.8,649.43 ; R10.2@460.16,690.63 428.8,649.43 ; R10.2@467.13,687.75 425,645.63 425,550 435,540 505,540 520,525 520,215 560,175 1555,175 1705,325 S1.2@1705,440.63 ; R10.2@467.32,684.02 428.8,649.43 ; S1.2@1683.75,436.97 1705,377.07 ; S1.2@1695.47,439.91 1705,377.07 ; S1.2@1714.53,439.91 1705,377.07 ; S1.2@1726.25,436.97 1705,377.07
  Top Layer w15: Q2.1@210.71,687.75 R11.1@295,687.75 C23.1@382.5,687.75 R10.2@467.13,687.75 ; Q2.1@218.22,675.58 R11.1@283.06,679.74 ; Q2.1@218.22,699.93 R11.1@283.06,695.77 ; Q2.1@221.21,675.86 R11.1@283.06,695.77 ; Q2.1@221.21,699.65 R11.1@283.06,679.74 ; R11.1@284.6,679.53 Q2.1@224.41,687.75 ; R11.1@284.6,695.98 Q2.1@224.41,687.75 ; R11.1@285.16,687.75 Q2.1@224.41,687.75 ; R11.1@304.02,679.55 C23.1@365.44,677.53 ; R11.1@304.02,695.96 C23.1@365.44,697.98 ; R11.1@306.76,679.73 C23.1@365.44,697.98 ; R11.1@306.76,695.78 C23.1@365.44,677.53 ; C23.1@375.45,675.62 R11.1@311.91,687.75 ; C23.1@375.45,699.89 R11.1@311.91,687.75 ; C23.1@376.59,687.75 R11.1@311.91,687.75 ; C23.1@387.69,699.92 R10.2@452.93,697.66 ; C23.1@388.66,675.57 R10.2@453.06,683 ; C23.1@389.08,699.92 R10.2@453.08,690.3 ; C23.1@389.55,675.62 R10.2@453.09,687.75 ; C23.1@389.55,699.89 R10.2@453.09,687.75 ; C23.1@390.03,675.68 R10.2@453.08,690.3 ; C23.1@390.44,699.77 R10.2@453.06,683 ; C23.1@391.37,675.94 R10.2@452.93,697.66 ; R10.2@459.21,698.82 C23.1@399.32,687.75 ; R10.2@459.99,682.38 C23.1@399.32,687.75 ; R10.2@460.16,690.63 C23.1@399.32,687.75 ; Q2.1@218.58,687.75 R11.1@283.06,679.74 ; Q2.1@218.58,687.75 R11.1@283.27,687.75 ; Q2.1@218.58,687.75 R11.1@283.06,695.77 ; Q2.1@218.58,687.75 R11.1@283.27,687.75 ; R11.1@283.27,687.75 219.73,675.62 R11.1@283.27,687.75 ; R11.1@283.27,687.75 219.73,699.89 R11.1@283.27,687.75 ; R11.1@304.84,687.75 C23.1@365.44,677.53 ; R11.1@304.84,687.75 C23.1@365.59,687.75 ; R11.1@304.84,687.75 C23.1@365.44,697.98 ; R11.1@304.84,687.75 C23.1@365.59,687.75 ; C23.1@365.59,687.75 305.4,679.53 C23.1@365.59,687.75 ; C23.1@365.59,687.75 305.4,695.98 C23.1@365.59,687.75 ; C23.1@388.41,687.75 R10.2@453.06,683 ; C23.1@388.41,687.75 R10.2@453.08,690.3 ; C23.1@388.41,687.75 R10.2@452.93,697.66 ; C23.1@388.41,687.75 R10.2@453.09,687.75
NetC24_1: C24.1 Q3.1 R12.2 R13.1 | length 3075.9
  Top Layer w15: Q3.1@210.71,502.75 R13.1@295,502.75 C24.1@382.5,502.75 467.87,502.75 R12.2@470,500.63 ; Q3.1@218.58,502.75 R13.1@283.27,502.75 ; Q3.1@219.73,490.62 R13.1@283.27,502.75 ; Q3.1@219.73,514.89 R13.1@283.27,502.75 ; R13.1@283.12,494.76 Q3.1@224.86,513.91 ; R13.1@283.12,510.75 Q3.1@224.86,491.6 ; R13.1@286.11,494.56 Q3.1@224.86,491.6 ; R13.1@286.11,510.95 Q3.1@224.86,513.91 ; R13.1@304.84,502.75 C24.1@365.59,502.75 ; R13.1@305.4,494.53 C24.1@365.59,502.75 ; R13.1@305.4,510.98 C24.1@365.59,502.75 ; C24.1@374.09,490.83 R13.1@311.99,510.08 ; C24.1@374.09,514.68 R13.1@311.99,495.43 ; C24.1@376.83,490.57 R13.1@311.99,495.43 ; C24.1@376.83,514.94 R13.1@311.99,510.08 ; C24.1@388.41,502.75 R12.2@453.09,502.75 ; C24.1@389.55,490.62 R12.2@453.09,502.75 ; C24.1@389.55,514.89 R12.2@453.09,502.75 ; R12.2@457.97,492.68 C24.1@400.04,512.88 ; R12.2@458.52,508.71 C24.1@398.89,492.41 ; R12.2@460.71,492.4 C24.1@398.89,492.41 ; R12.2@461.26,508.8 C24.1@400.04,512.88 ; Q3.1@224.41,502.75 R13.1@285.16,502.75 ; Q3.1@224.41,502.75 284.6,510.98 Q3.1@224.41,502.75 ; Q3.1@224.41,502.75 284.6,494.53 Q3.1@224.41,502.75 ; Q3.1@224.41,502.75 R13.1@285.16,502.75 ; Q3.1@224.86,491.6 R13.1@285.16,502.75 ; Q3.1@224.86,513.91 R13.1@285.16,502.75 ; R13.1@311.91,502.75 C24.1@376.59,502.75 ; R13.1@311.91,502.75 375.45,514.89 R13.1@311.91,502.75 ; R13.1@311.91,502.75 375.45,490.62 R13.1@311.91,502.75 ; R13.1@311.91,502.75 C24.1@376.59,502.75 ; R13.1@311.99,495.43 C24.1@376.59,502.75 ; R13.1@311.99,510.08 C24.1@376.59,502.75 ; C24.1@398.89,492.41 R12.2@460.16,500.63 ; C24.1@399.29,502.75 R12.2@460.16,500.63 ; C24.1@399.29,502.75 459.89,508.87 C24.1@399.36,502.75 ; C24.1@399.29,502.75 459.31,492.43 C24.1@399.36,502.75 ; C24.1@399.36,502.75 R12.2@460.16,500.63 ; C24.1@400.04,512.88 R12.2@460.16,500.63
NetC25_1: C25.1 R14.2 R21.2 R22.2 | length 3066
  Top Layer w15: R14.2@202.4,936.49 290,936.49 377.5,936.49 R21.2@465,936.49 ; R14.2@211.9,928.25 R22.2@273.36,929.8 ; R14.2@211.9,944.74 R22.2@273.36,943.19 ; R14.2@213.69,928.37 R22.2@273.36,943.19 ; R14.2@213.69,944.62 R22.2@273.36,929.8 ; R22.2@284.6,928.27 R14.2@224.41,936.49 ; R22.2@284.6,944.72 R14.2@224.41,936.49 ; R22.2@285.16,936.49 R14.2@224.41,936.49 ; R22.2@304.02,928.29 C25.1@365.44,926.27 ; R22.2@304.02,944.7 C25.1@365.44,946.72 ; R22.2@306.76,928.47 C25.1@365.44,946.72 ; R22.2@306.76,944.52 C25.1@365.44,926.27 ; C25.1@375.45,924.36 R22.2@311.91,936.49 ; C25.1@375.45,948.63 R22.2@311.91,936.49 ; C25.1@376.59,936.49 R22.2@311.91,936.49 ; C25.1@388.17,924.31 R21.2@453.01,929.17 ; C25.1@388.17,948.68 R21.2@453.01,943.82 ; C25.1@390.91,924.57 R21.2@453.01,943.82 ; C25.1@390.91,948.42 R21.2@453.01,929.17 ; R21.2@459.6,928.27 C25.1@399.41,936.49 ; R21.2@459.6,944.72 C25.1@399.41,936.49 ; R21.2@460.16,936.49 C25.1@399.41,936.49 ; R14.2@212.24,936.49 R22.2@272.99,936.49 ; R14.2@212.24,936.49 R22.2@273.36,943.19 ; R14.2@212.24,936.49 R22.2@273.36,929.8 ; R14.2@212.24,936.49 R22.2@272.99,936.49 ; R22.2@272.99,936.49 212.8,928.27 R22.2@272.99,936.49 ; R22.2@272.99,936.49 212.8,944.72 R22.2@272.99,936.49 ; R22.2@304.84,936.49 C25.1@365.44,926.27 ; R22.2@304.84,936.49 C25.1@365.59,936.49 ; R22.2@304.84,936.49 C25.1@365.44,946.72 ; R22.2@304.84,936.49 C25.1@365.59,936.49 ; C25.1@365.59,936.49 305.4,928.27 C25.1@365.59,936.49 ; C25.1@365.59,936.49 305.4,944.72 C25.1@365.59,936.49 ; C25.1@388.41,936.49 R21.2@453.09,936.49 ; C25.1@388.41,936.49 R21.2@453.01,943.82 ; C25.1@388.41,936.49 R21.2@453.01,929.17 ; C25.1@388.41,936.49 R21.2@453.09,936.49 ; R21.2@453.09,936.49 389.55,924.36 R21.2@453.09,936.49 ; R21.2@453.09,936.49 389.55,948.63 R21.2@453.09,936.49